# Altium PCB PCB_TP1.PcbDoc
Units mil, origin at the board's own origin, x right, y up, seen from the top; angles counter-clockwise.
Board outline 6000 x 4000 mil, 2 copper layers (Top Layer, Bottom Layer); 35 components, 19 nets, 89 pads, 0 vias.
Unrouted connection lines stored in the file: 62.
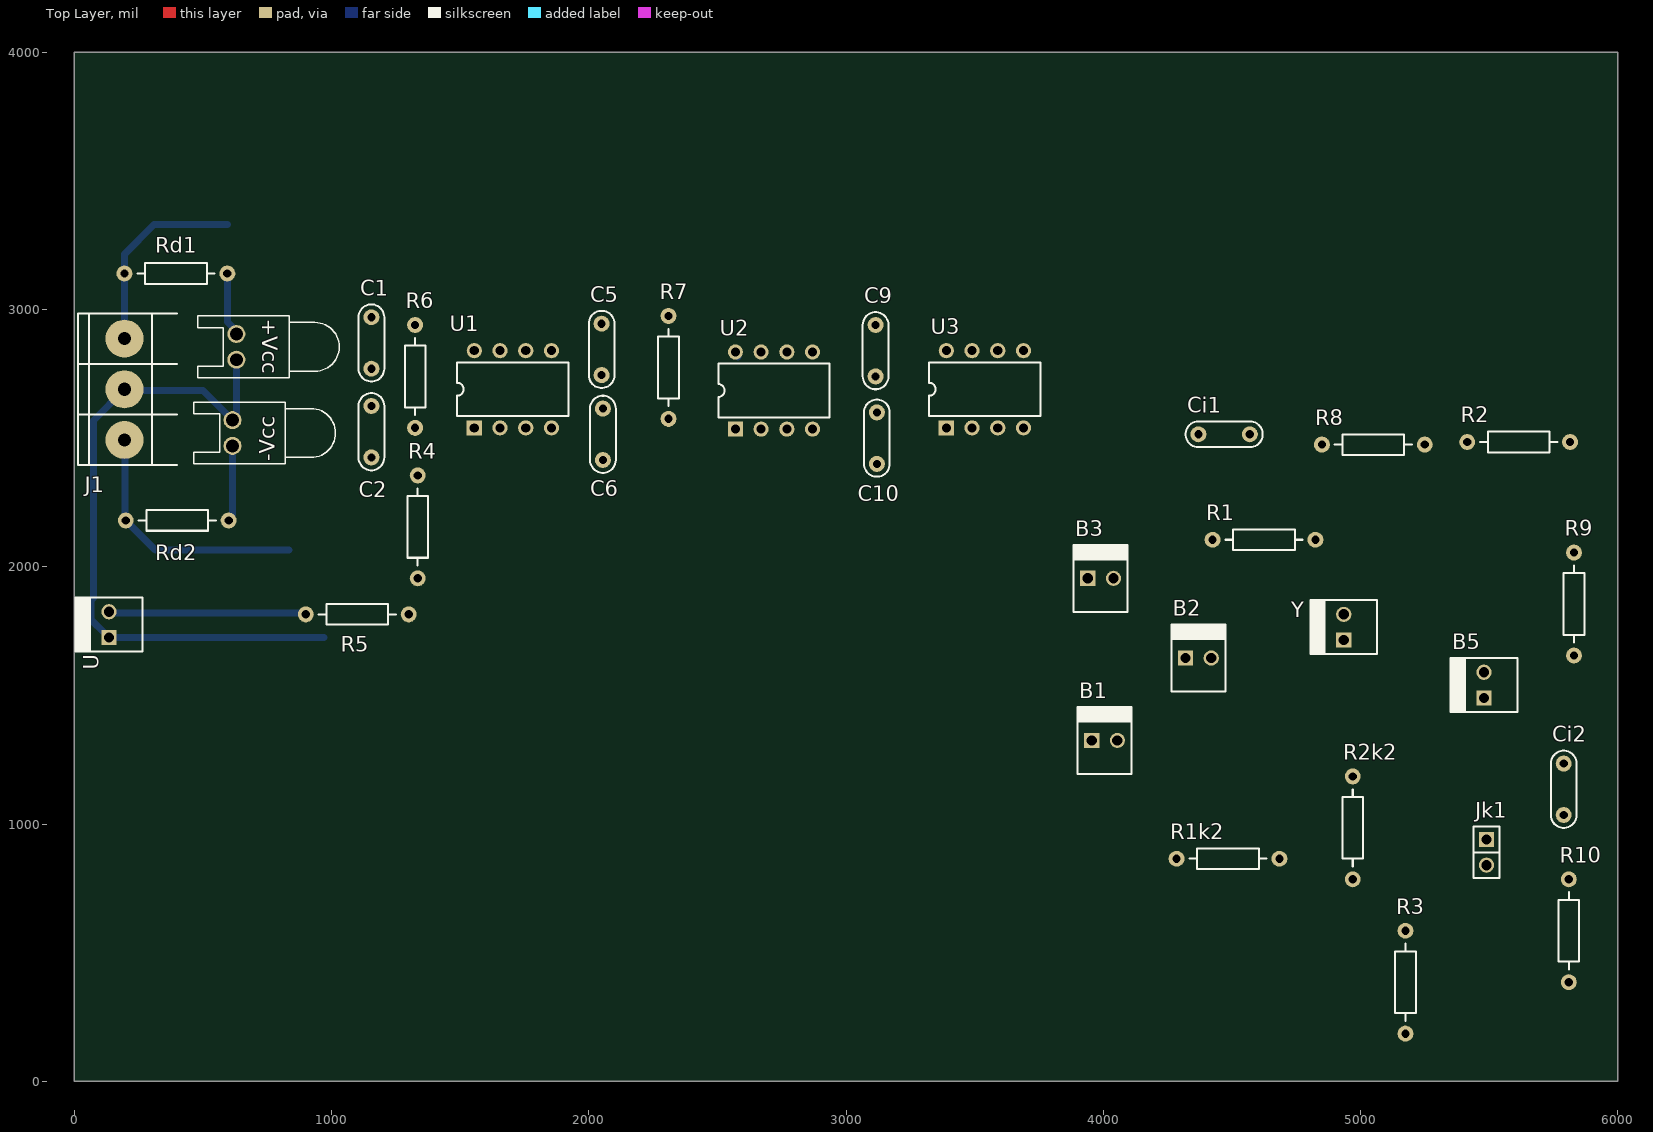
[diagram p0: Top Layer view]
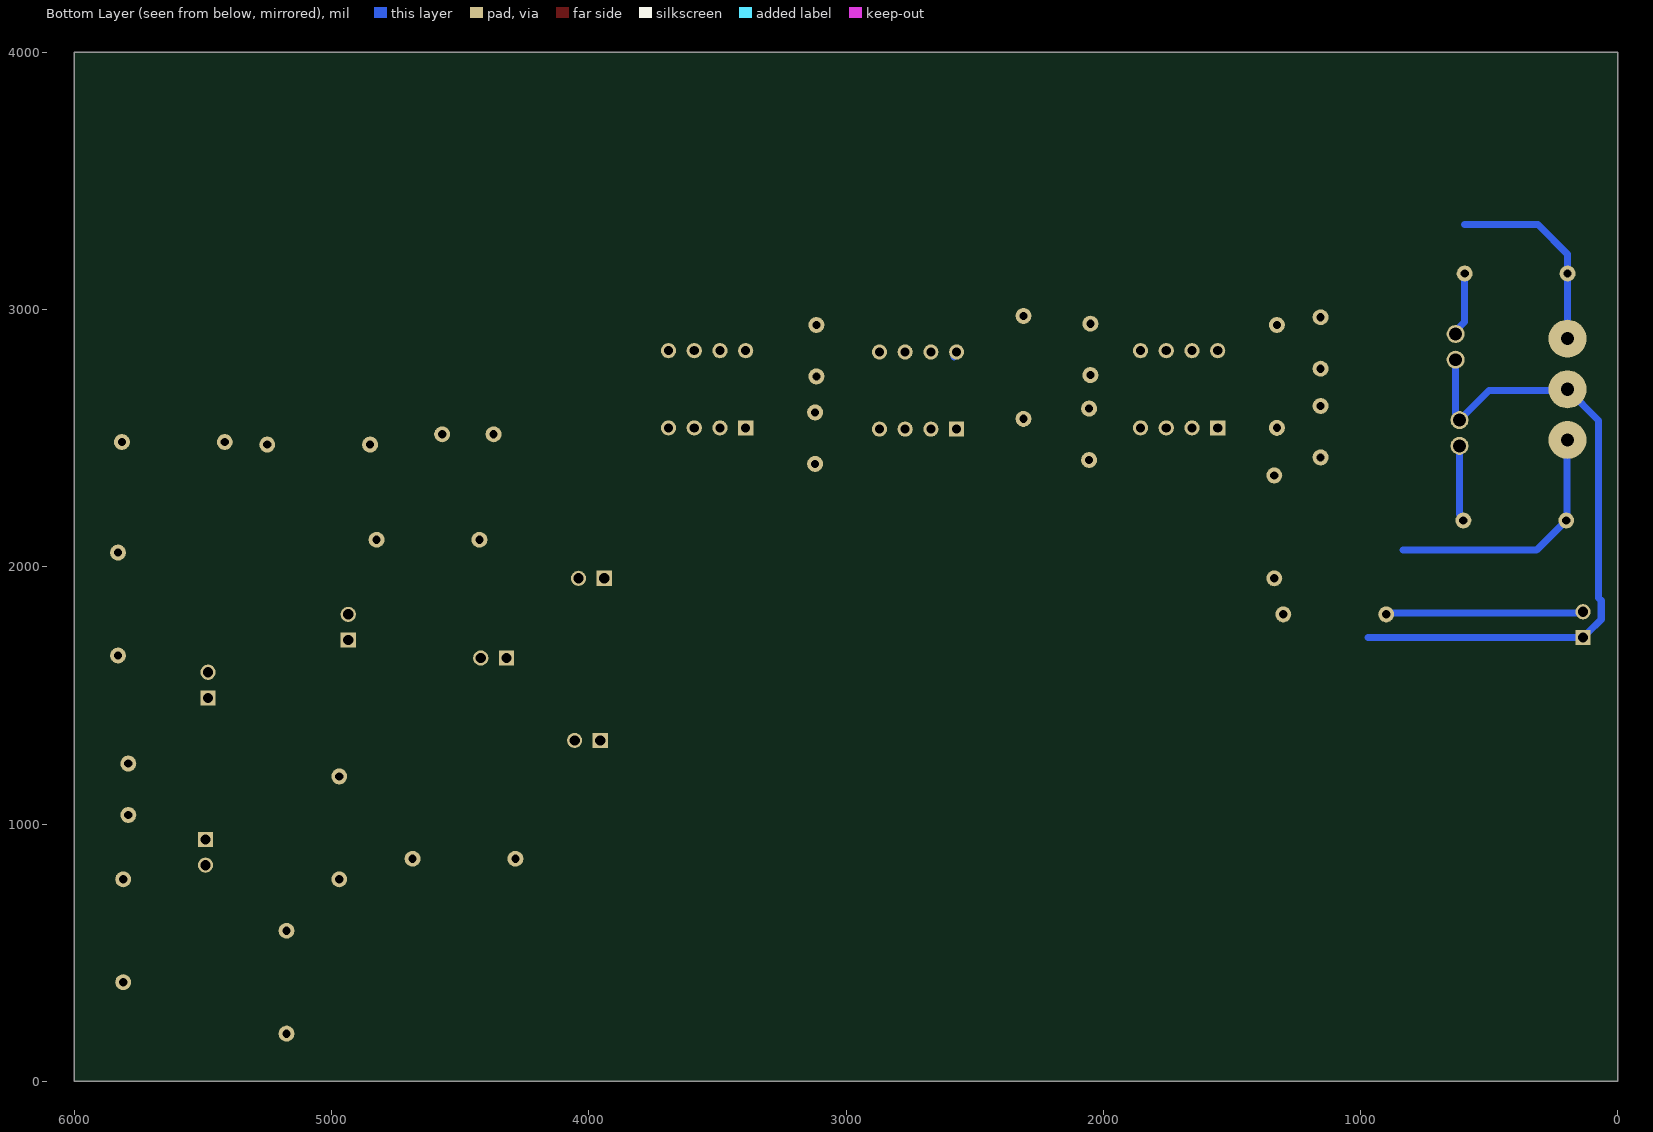
[diagram p1: Bottom Layer view, seen from below]

## Layer stack, top to bottom
Top Solder: solder mask 0.4, Solder Resist, Dk 3.5
Top Layer: signal copper 1.4
Dielectric 1: dielectric 12.6, FR-4, Dk 4.8
Bottom Layer: signal copper 1.4
Bottom Solder: solder mask 0.4, Solder Resist, Dk 3.5

## Board outline
0,0 6000,0 6000,4000 0,4000

## Design rules (kind name [scope] priority, off if disabled: settings)
Clearance [All] p1: gap=27.56 ignorepadtopadclearanceinfootprint=FALSE
PolygonConnect [All] p1: connectstyle=Relief reliefconductorwidth=10 reliefentries=4 polygonreliefangle="90 Angle" airgapwidth=10
RoutingVias [All] p1: holewidth=28 width=50 viastyle="Through Hole" minholewidth=28 minwidth=50 maxholewidth=28 maxwidth=50
SolderMaskExpansion [All] p1: expansion=4 istentingtop=FALSE
Width [All] p1: maxlimit=27.56 minlimit=27.56 preferedwidth=27.56 minimp=50.000000 maximp=50.000000 favimp=50.000000
30 further rules are at their usual default settings.

## Components (designator, comment, footprint, x,y, rotation, side; value= is the part's Value field where it differs from the comment)
+Vcc "LED0" LED-0 630,2855 r90 top
-Vcc "LED0" LED-0 615,2520 r90 top
B1 "MOLEX2" MOLEX2 3955,1325 r0 top
B2 "MOLEX2" MOLEX2 4320,1645 r0 top
B3 "MOLEX2" MOLEX2 3940,1955 r0 top
B5 "MOLEX2" MOLEX2 5480,1490 r90 top
C1 "100n" CAP200 1155,2870 r90 top
C2 "100n" CAP200 1155,2525 r270 top
C5 "100n" CAP200 2050,2845 r90 top
C6 "100n" CAP200 2055,2515 r270 top
C9 "100n" CAP200 3115,2840 r90 top
C10 "100n" CAP200 3120,2500 r270 top
Ci1 "1u" CAP200 4470,2515 r180 top
Ci2 "1u" CAP200 5790,1135 r90 top
J1 "BORNERA 3" BORNERA3 195,2690 r0 top
Jk1 "JUMPER" JUMPER2 5490,890 r270 top
R1 "10k" RES400 4825,2105 r180 top
R1k2 "10k" RES400 4285,865 r0 top
R2 "10k" RES400 5415,2485 r0 top
R2k2 "3.3k" RES400 4970,785 r90 top
R3 "10k" RES400 5175,185 r90 top
R4 "10k" RES400 1335,1955 r90 top
R5 "10k" RES400 900,1815 r0 top
R6 "10k" RES400 1325,2540 r90 top
R7 "10k" RES400 2310,2975 r270 top
R8 "10k" RES400 4850,2475 r0 top
R9 "47k" RES400 5830,2055 r270 top
R10 "10k" RES400 5810,785 r270 top
Rd1 "560" RES400 195,3140 r0 top
Rd2 "560" RES400 600,2180 r180 top
U "MOLEX2" MOLEX2 135,1725 r90 top
U1 "TL082P" P008 1705,2690 r0 top
U2 "TL082P" P008 2720,2685 r0 top
U3 "TL082P" P008 3540,2690 r0 top
Y "MOLEX2" MOLEX2 4935,1715 r90 top

## Footprints (in the part's own frame and the unit in brackets; to place one, negate y for a bottom-side part, rotate by r counter-clockwise, add the part's x,y. Pads: shape width x height; smd on the part's side, far side on the other; paste and mask are expansions set on the pad)
BORNERA3 [mm] "Bornera con Tornillos 5mm separación"
  round 3.75 hole 1.3: 1(0,5) 2(0,0) 3(0,-5)
  silkscreen extent -4.6,-7.5 5.2,7.5, body extent -3.76,-7.39 3.94,8.11, height 10.05
CAP200 [mil]
  round 62 hole 32: 1(-100,0) 2(100,0)
  silkscreen extent -150,-50 150,50, body extent -110,-46 110,44, height 246
JUMPER2 [mm]
  rect 1.5x1.5 hole 1.016: 1(-1.27,0)
  round 1.5 hole 1.016: 2(1.27,0)
  silkscreen extent -2.54,-1.27 2.54,1.27, body extent -2.46,-1.27 2.54,1.27, height 9.5
LED-0 [mil] "LED; 2 Leads"
  round 70 hole 50: 1(50,0) 2(-50,0)
  silkscreen extent -120,-400 120,150
MOLEX2 [mm]
  rect 1.5x1.5 hole 1.016: 1(0,0)
  round 1.5 hole 1.016: 2(2.54,0)
  silkscreen extent -1.4,-3.3 3.94,3.3, body extent -1.27,-3.17 3.81,3.17, height 10.74
P008 [mm] "DIP; 8 Leads; Row Spacing 7.62 mm; Pitch 2.54 mm"
  rect 1.5x1.5 hole 0.9: 1(-3.81,-3.81)
  round 1.5 hole 0.9: 2(-1.27,-3.81) 3(1.27,-3.81) 4(3.81,-3.81) 5(3.81,3.81) 6(1.27,3.81) 7(-1.27,3.81) 8(-3.81,3.81)
  silkscreen extent -5.5,-2.65 5.5,2.65
RES400 [mil]
  round 62 hole 32: 1(0,0) 2(400,0)
  silkscreen extent 50,-40 350,40, body extent -12,-45 412,46, height 96

## Part data
+Vcc -Vcc: "Typical INFRARED GaAs LED", LatestRevisionDate=08-Jul-2005, LatestRevisionNote="Mech Layer 1 removed.", PackageDescription="LED; 2 Leads", PackageReference=LED-0, Published=8-Jun-2000, Publisher="Altium Limited"
C1 C2 C5 C6 C9 C10 Ci1 Ci2: library part CAP
R1 R1k2 R2 R2k2 R3 R4 R5 R6 R7 R8 R9 R10 Rd1 Rd2: library part RES
U1 U2 U3: "JFET-Input Operational Amplifier", Code_JEDEC=MO-001-AN, ComponentLink1Description="Manufacturer Link", ComponentLink1URL=http://www.ti.com/, ComponentLink2Description=Datasheet, ComponentLink2URL=http://www-s.ti.com/sc/ds/tl082.pdf, DatasheetVersion=Feb-1999, LatestRevisionDate=04-Mar-2005, LatestRevisionNote="Stylized 3D Model Added.", PackageDescription="DIP; 8 Leads; Row Spacing 7.62 mm; Pitch 2.54 mm", PackageReference=P008, PackageVersion=Jun-1999, Published=16-Jan-2001, Publisher="Altium Limited"

## Nets (pads, with @x,y where several pads share a name; then routed paths per layer and width w, separated by ;. In a path a pad name is that pad's centre, name@x,y a point inside that pad or via, vN(x,y) a via of type N, cw(c..) or ccw(c..) an arc to the next point about the centre after c; other vN are vias at no path point)
+12V: C1.1 C5.1 C9.1 J1.1 Rd1.1 U1.8 U2.8 U3.8 | length 800.1
  Bottom Layer w27.56: J1.1 Rd1.1 195,3215 310,3330 595,3330 ; U1.8@1555,2839.78 U1.8 ; U2.8 2570,2826.48 2580,2816.48 U2.8@2580,2815
-12V: C2.1 C6.1 C10.1 J1.3 Rd2.2 U1.4 U2.4 U3.4 | length 998.5
  Bottom Layer w27.56: J1.3 197.5,2490.65 197.5,2182.5 Rd2.2 315,2065 835,2065 ; U1.4 U1.4@1855,2540.22 ; U2.4 U2.4@2870,2535.22 ; U3.4 U3.4@3690,2540.22
GND: +Vcc.2 -Vcc.1 B1.1 B2.1 B3.1 B5.2 C1.2 C2.2 C5.2 C6.2 C9.2 C10.2 J1.2 U1.3 U1.5 U2.3 U2.5 U3.3 U3.5 U.1 Y.2 | length 2601.7
  Bottom Layer w27.56: +Vcc.2 630,2596.48 615,2581.48 -Vcc.1 500,2685 200,2685 J1.2 74.13,2569.13 74.13,1878.15 64.13,1868.15 64.13,1795.65 119.03,1740.75 119.25,1740.75 U.1 970,1725 ; C2.2@1150,2420 C2.2
Net+Vcc_1: +Vcc.1 Rd1.2 | length 249.5
  Bottom Layer w27.56: Rd1.2 595,2951.48 630,2916.48 +Vcc.1
Net-Vcc_2: -Vcc.2 Rd2.1 | length 296.2
  Bottom Layer w27.56: Rd2.1 600,2189.32 615,2204.32 -Vcc.2
NetB1_2: B1.2 Ci1.1 R8.1 U2.1
NetB2_2: B2.2 R2.2 R2k2.2 R9.1 U2.7
NetB3_2: B3.2 Ci2.1 R10.1 U3.1
NetB5_1: B5.1 Jk1.1 R1k2.1 R4.1 R5.2 U1.2 | length 9.3
  Bottom Layer w27.56: R4.1@1335,1945.68 R4.1
NetCi1_2: Ci1.2 R7.2 U2.2
NetCi2_2: Ci2.2 R9.2 U3.2
NetJk1_2: Jk1.2 R3.2 U3.7 Y.1
NetR1_1: R1.1 R6.2 U1.6
NetR1_2: R1.2 R7.1 U1.7
NetR1k2_2: R1k2.2 R2k2.1
NetR2_1: R2.1 R8.2 U2.6
NetR3_1: R3.1 R10.2 U3.6
NetR4_2: R4.2 R6.1 U1.1
NetR5_1: R5.1 U.2 | length 769.1
  Bottom Layer w27.56: U.2 140,1820 895,1820 R5.1